# Altium PCB 最小系统.PcbDoc
Units mm, origin at the board's own origin, x right, y up, seen from the top; angles counter-clockwise.
Board outline 152.4 x 101.6 mm, 2 copper layers (Top Layer, Bottom Layer); 7 components, 9 nets, 50 pads, 0 vias.
Unrouted connection lines stored in the file: 2.
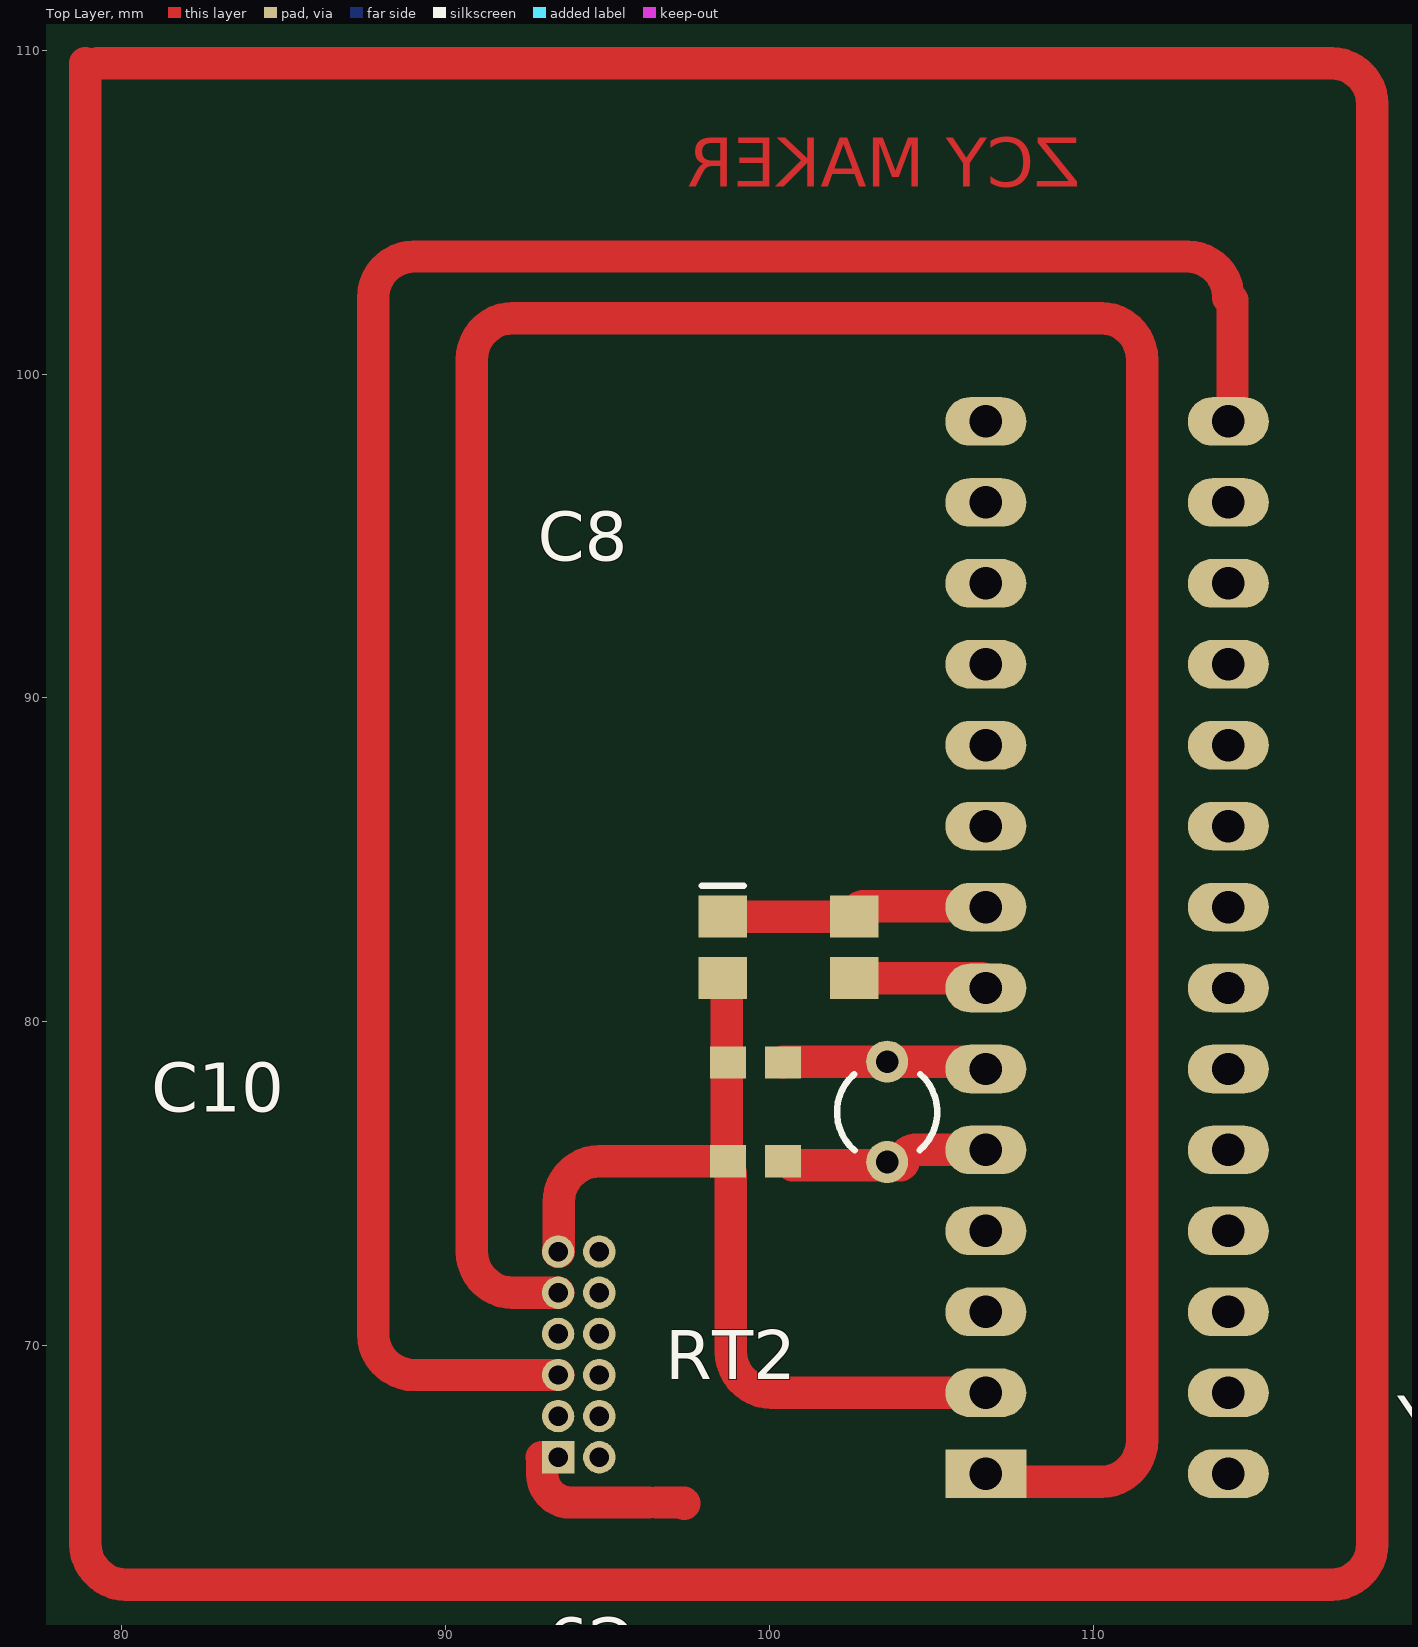
[diagram p0: Top Layer view]
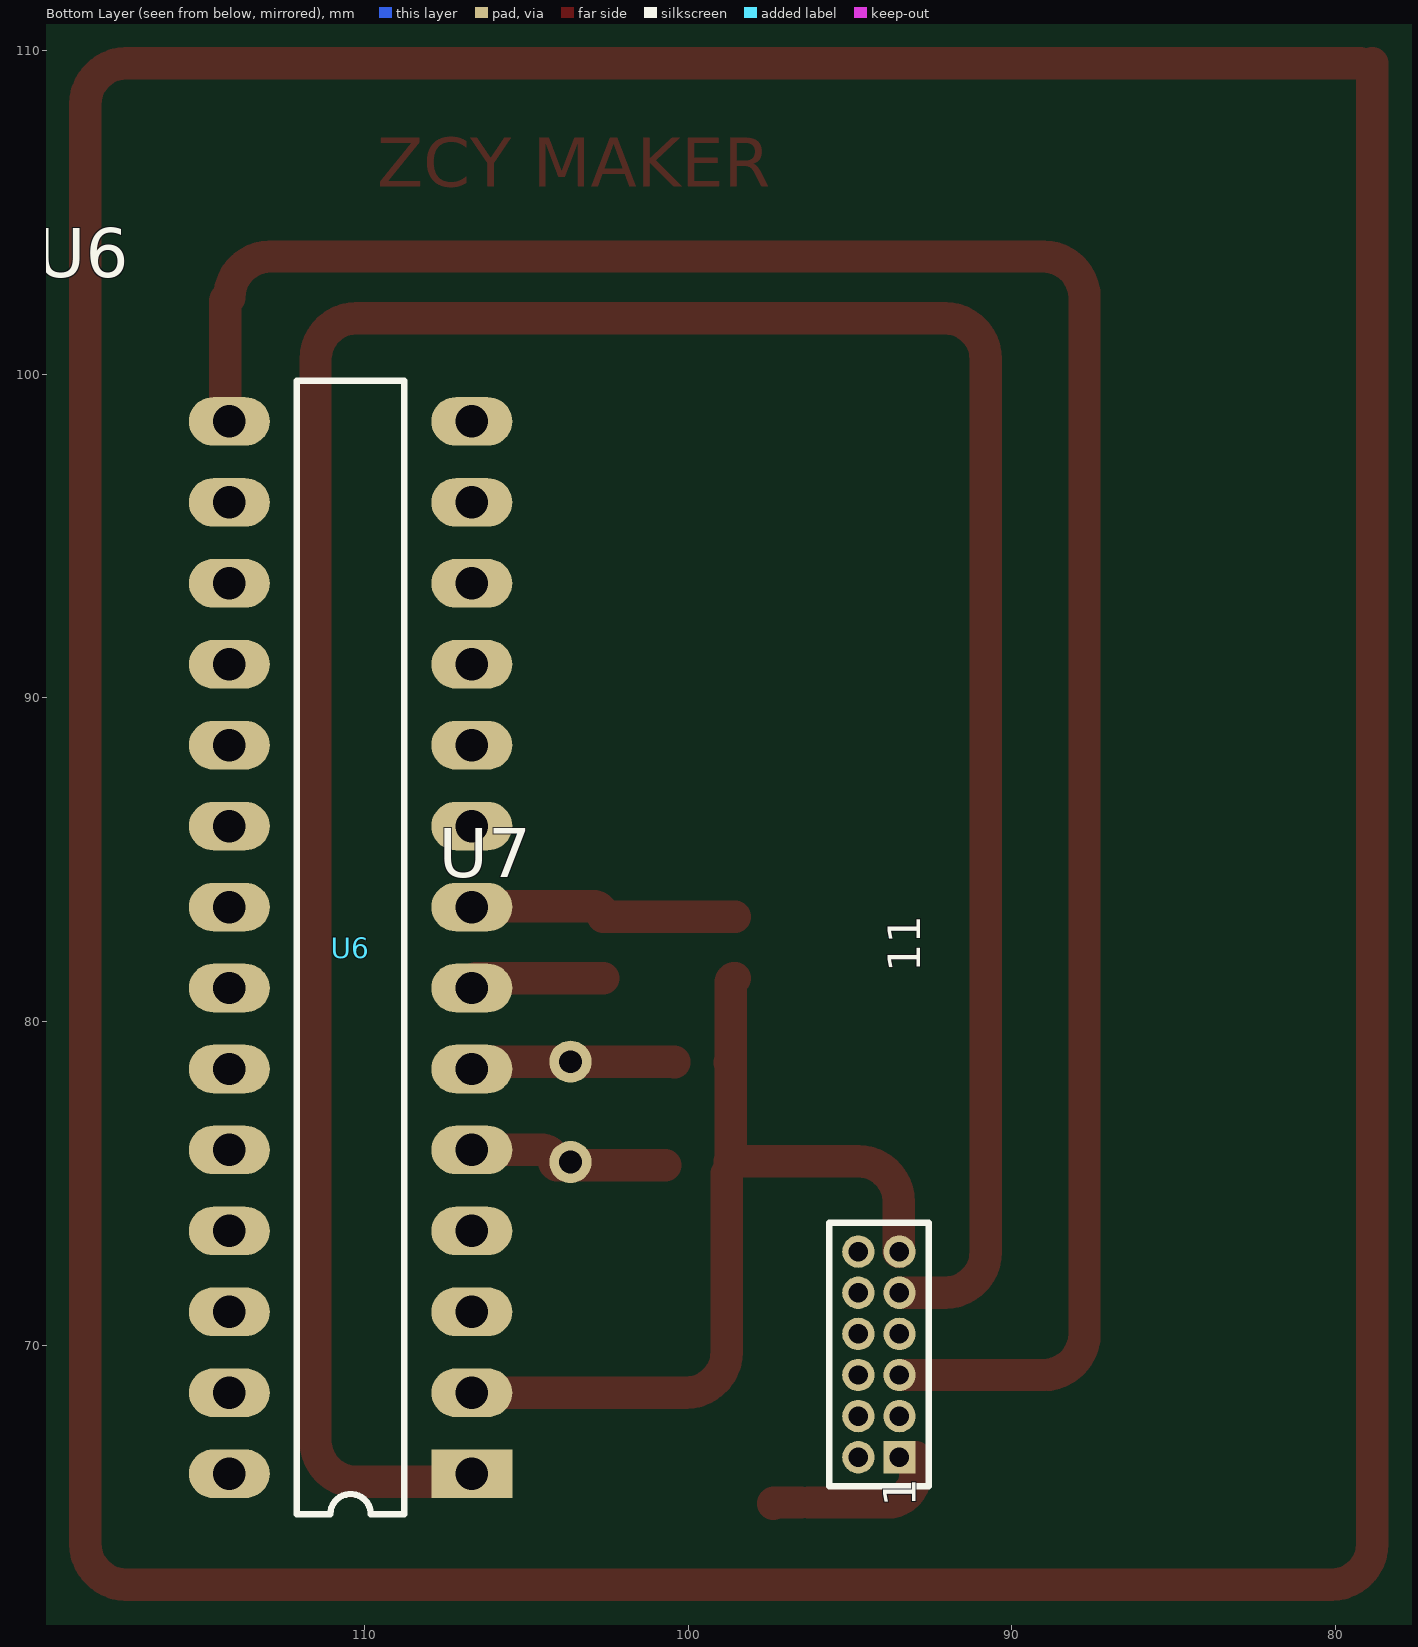
[diagram p1: Bottom Layer view, seen from below]

## Layer stack, top to bottom
Top Layer: signal copper 0.0356
Dielectric: dielectric 0.32, FR-4, Dk 4.8
Bottom Layer: signal copper 0.0356

## Board outline
25.4,25.4 177.8,25.4 177.8,127 25.4,127

## Design rules (kind name [scope] priority, off if disabled: settings)
Clearance [All] p1: gap=0.254
ComponentClearance [All] p1: gap=0.254 collisioncheckmode=3 verticalgap=0.254
PolygonConnect [All] p1: connectstyle=Relief reliefconductorwidth=0.254 reliefentries=4 polygonreliefangle="90 Angle"
RoutingVias [All] p1: holewidth=0.711 width=1.27 viastyle="Through Hole" minholewidth=0.711 minwidth=1.27 maxholewidth=0.711 maxwidth=1.27
SolderMaskExpansion [All] p1: expansion=0.102
TestPointUsage [All] p1: valid=0 allowmultiple=FALSE
Testpoint [All] p1: side=15 testpointundercomponent=TRUE minsize=1.016 maxsize=2.54 preferedsize=1.524 minholesize=0 maxholesize=1.016 preferedholesize=0.813 testpointgrid=0.025 style=1023 order=0-112345678
Width [All] p1: maxlimit=2 minlimit=0.254 preferedwidth=0.254 toplayer_prefwidth=2 bottomlayer_maxwidth=0.254 minimp=50.000000 maximp=50.000000 favimp=50.000000
18 further rules are at their usual default settings.

## Components (designator, comment, footprint, x,y, rotation, side; value= is the part's Value field where it differs from the comment)
C8 "Cap Pol3" C0805 98.552,82.296 r270 top
C9 "Cap Semi" 1608[0603] 99.568,78.74 r180 top
C10 "Cap Semi" 1608[0603] 99.568,75.692 r180 top
RT2 "" 6-0805 102.616,82.296 r90 top
U6 "HT66F50" DIP28 106.68,66.04 r0 bottom
U7 "CON12" MHDR2X6 93.472,66.548 r90 bottom
Y2 "XTAL" R38 103.632,77.216 r0 top

## Footprints (in the part's own frame and the unit in brackets; to place one, negate y for a bottom-side part, rotate by r counter-clockwise, add the part's x,y. Pads: shape width x height; smd on the part's side, far side on the other; paste and mask are expansions set on the pad)
6-0805 [mm] "Chip Resistor; Body 2.0 x 1.3 mm (LxW typ)"
  rect 1.3x1.5 smd: 1(-0.95,0) 2(0.95,0)
1608[0603] [mm] "Chip Capacitor; Body 1.6 x 0.8 mm (LxW typ)"
  rect 1.1x1 smd: 1(-0.85,0) 2(0.85,0)
C0805 [mm] "Chip Capacitor; Body 2.0 x 1.2 mm (LxW typ)"
  rect 1.3x1.5 smd: 1(-0.95,0) 2(0.95,0)
  silkscreen extent -1.9,-0.65 -1.9,0.65
DIP28 [mm]
  rect 2.5x1.5 hole 1: 1(0,0)
  oval 2.5x1.5 hole 1: 2(0,-2.5) 3(0,-5) 4(0,-7.5) 5(0,-10) 6(0,-12.5) 7(0,-15) 8(0,-17.5) 9(0,-20) 10(0,-22.5) 11(0,-25) 12(0,-27.5) 13(0,-30) 14(0,-32.5) 15(7.49,-32.5) 16(7.49,-30) 17(7.49,-27.5) 18(7.49,-25) 19(7.49,-22.5) 20(7.49,-20) 21(7.49,-17.5) 22(7.49,-15) 23(7.49,-12.5) 24(7.49,-10) 25(7.49,-7.5) 26(7.49,-5) 27(7.49,-2.5) 28(7.49,0)
  silkscreen extent 2.08,-33.75 5.41,1.25
MHDR2X6 [mm] "Connector; Header; 6x2 Position"
  rect 1x1 hole 0.6: 1(0,0)
  round 1 hole 0.6: 2(0,1.27) 3(1.27,0) 4(1.27,1.27) 5(2.54,0) 6(2.54,1.27) 7(3.81,0) 8(3.81,1.27) 9(5.08,0) 10(5.08,1.27) 11(6.35,0) 12(6.35,1.27)
  silkscreen extent -0.9,-0.9 7.25,2.17
R38 [mm] "Crystal, Thru-Hole; 2 Leads; Body 3.1 x 8.2 mm (Dia.xH)"
  round 1.3 hole 0.7: 1(0,1.55) 2(0,-1.55)
  silkscreen extent -1.55,-1.19 1.55,1.17

## Part data
C8: "Polarized Capacitor (Surface Mount)"
C9 C10: "Capacitor (Semiconductor SIM Model)"
RT2: library part "Res Thermal", "Thermistor"
Y2: "Crystal Oscillator"

## Nets (pads, with @x,y where several pads share a name; then routed paths per layer and width w, separated by ;. In a path a pad name is that pad's centre, name@x,y a point inside that pad or via, vN(x,y) a via of type N, cw(c..) or ccw(c..) an arc to the next point about the centre after c; other vN are vias at no path point)
GND: C8.2 C9.2 C10.2 U6.2 U7.11 | length 27.4
  Top Layer w1: U7.11 U7.11@93.488,72.898 ; U7.11@93.488,72.898 93.488,74.422 cw(c94.758,74.422) 94.758,75.692 C10.2 ; C8.2 cw(c98.552,81.219) 98.679,81.219 C10.2@98.679,75.653 ; C9.2@98.679,78.701 cw(c98.718,78.701) C9.2 ; C10.2@98.806,75.311 98.806,69.81 ccw(c100.076,69.81) 100.076,68.54 U6.2
OSC1: C10.1 U6.5 Y2.2 | length 6.3
  Top Layer w1: C10.1@100.711,75.565 104.013,75.565 ccw(c104.013,75.692) 104.14,75.692 cw(c104.488,75.692) 104.488,76.04 U6.5 ; Y2.2@103.606,75.692 cw(c103.606,75.666) Y2.2 ccw(c103.606,75.666) Y2.2@103.606,75.692
OSC2: C9.1 U6.6 Y2.1 | length 6.3
  Top Layer w1: Y2.1 ccw(c103.658,78.766) Y2.1@103.658,78.74 ; U6.6@106.553,78.613 ccw(c106.4,78.613) 106.4,78.766 C9.1@100.444,78.766 ; C9.1@100.444,78.766 ccw(c100.444,78.74) C9.1 cw(c100.444,78.74) C9.1@100.444,78.766
RES: C8.1 RT2.2 U6.8 U7.2 | length 8.6
  Top Layer w1: C8.1 RT2.2 cw(c102.936,83.246) 102.936,83.566 U6.8@106.934,83.566
SCK: U6.15 U7.5 | length 70.3
  Top Layer w1: U7.5 89.027,69.088 cw(c89.027,70.358) 87.757,70.358 87.757,102.362 cw(c89.027,102.362) 89.027,103.632 112.9,103.632 cw(c112.9,102.362) 114.17,102.362 cw(c114.17,102.232) 114.3,102.232 114.3,98.67 cw(c114.17,98.67) U6.15
SDAT: U6.1 U7.9 | length 92.5
  Top Layer w1: U7.9 92.075,71.628 cw(c92.075,72.898) 90.805,72.898 90.805,100.457 cw(c92.075,100.457) 92.075,101.727 110.236,101.727 cw(c110.236,100.457) 111.506,100.457 111.506,67.056 cw(c110.236,67.056) 110.236,65.786 U6.1@106.68,65.786 ; U6.1@106.934,65.913 cw(c107.188,65.913) U6.1@107.188,66.167
SDI: U6.14
SDO: U6.13
VCC: RT2.1 U6.7 U7.1 | length 9.8
  Top Layer w1: 92.964,66.548 92.98,66.548 92.98,66.024 ccw(c93.853,66.024) 93.853,65.151 96.266,65.151 ; 96.52,65.151 97.335,65.151 cw(c97.335,65.117) 97.369,65.117 ; RT2.1 106.487,81.346 cw(c106.487,80.899) U6.7@106.934,80.899
pads on no net: U6.3 U6.4 U6.9 U6.10 U6.11 U6.12 U6.16 U6.17 U6.18 U6.19 U6.20 U6.21 U6.22 U6.23 U6.24 U6.25 U6.26 U6.27 U6.28 U7.3 U7.4 U7.6 U7.7 U7.8 U7.10 U7.12
copper on no net: | length 171.5
  Top Layer w1: 78.867,109.601 78.867,63.881 ccw(c80.137,63.881) 80.137,62.611 117.348,62.611 ccw(c117.348,63.881) 118.618,63.881 118.618,108.331 ccw(c117.348,108.331) 117.348,109.601 79.248,109.601

## Other copper
Top Layer:
  text "ZCY MAKER" at 109.601,105.791 h1.52

## Text inside footprints (layer, text, board x,y; h text height)
U7: Bottom Overlay "11" at 92.837,81.534 h1 r270; Bottom Overlay "1" at 92.964,65.024 h1 r270